# Altium PCB TPS54627DDAR_PCB.PcbDoc
Units mil, origin at the board's own origin, x right, y up, seen from the top; angles counter-clockwise.
Board outline not stored, 2 copper layers (Top Layer, Bottom Layer); 13 components, 0 nets, 33 pads, 6 vias.
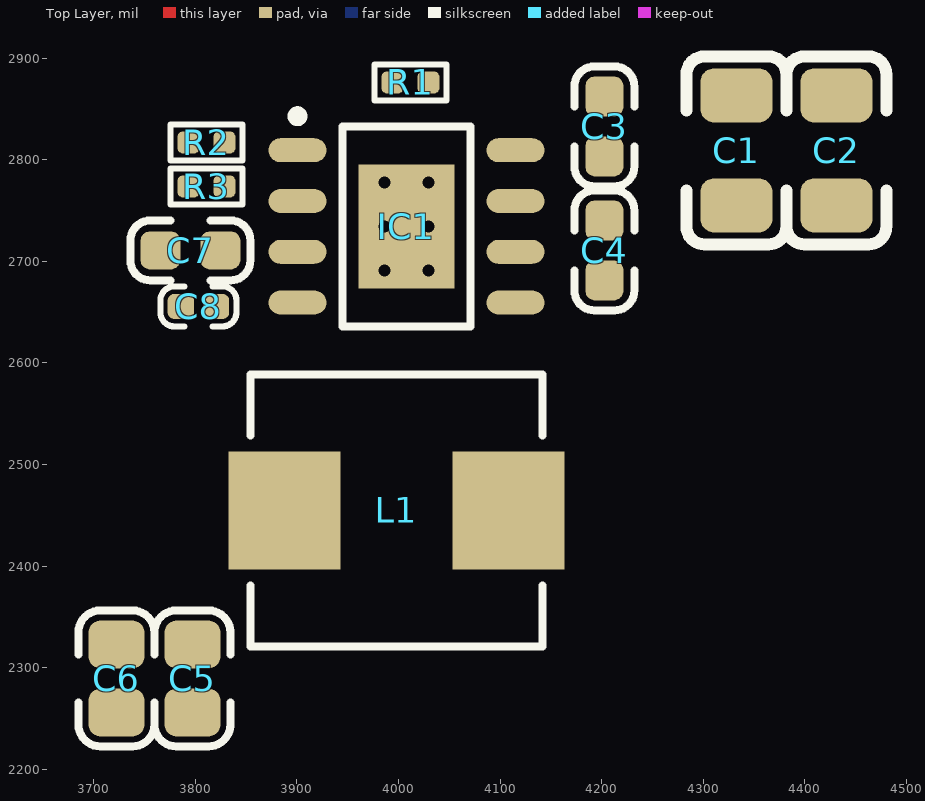
[diagram p0: Top Layer view]
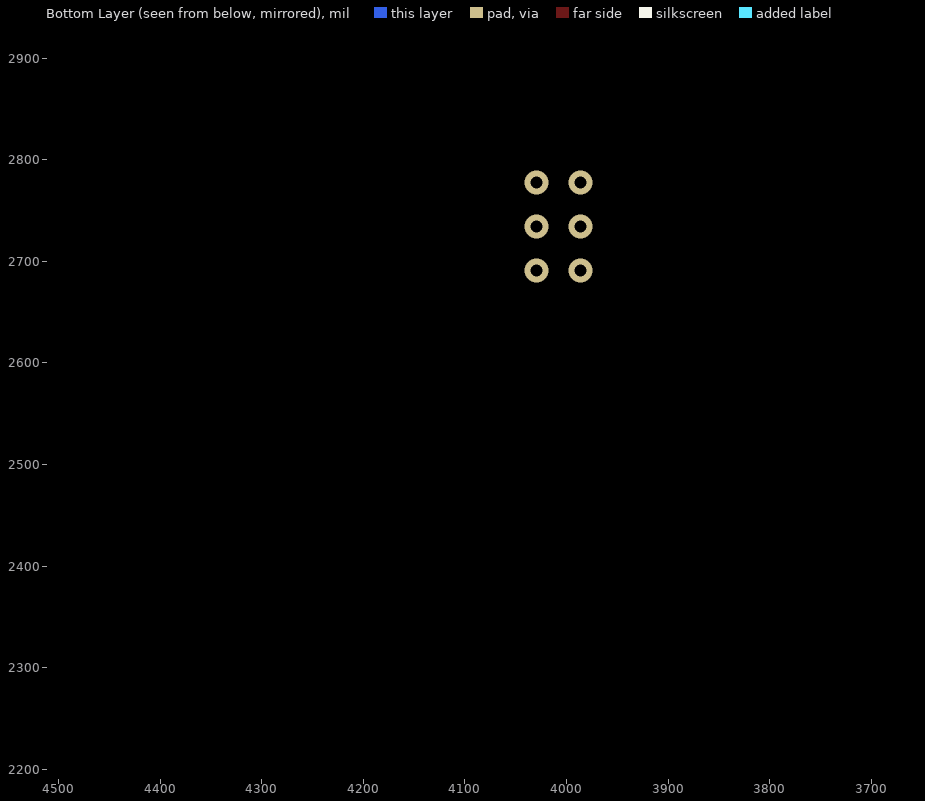
[diagram p1: Bottom Layer view, seen from below]

## Layer stack, top to bottom
Top Solder: solder mask 0.4, Solder Resist, Dk 3.5
Top Layer: signal copper 1.4
Dielectric 1: dielectric 12.6, FR-4, Dk 4.8
Bottom Layer: signal copper 1.4
Bottom Solder: solder mask 0.4, Solder Resist, Dk 3.5

## Components (designator, comment, footprint, x,y, rotation, side; value= is the part's Value field where it differs from the comment)
C1 "10uF" C_1206 4332.68,2809.05 r270 top
C2 "10uF" C_1206 4431.1,2809.05 r270 top
C3 "100nF" C_0603 4202.76,2832.68 r270 top
C4 "100nF" C_0603 4202.76,2710.63 r90 top
C5 "22uF" C_0805 3797.24,2289.37 r90 top
C6 "22uF" C_0805 3722.44,2289.37 r90 top
C7 "1uF" C_0603 3795.28,2710.63 r180 top
C8 "8.2nF" C_0402 3803.15,2655.51 r0 top
IC1 "TPS54627DDAR" SOIC-8-PowerPAD 4007.87,2734.25 r0 top
L1 "MHCI06030-3R3M-R8A" Ind-SMD_7.3x6.6 3998.03,2454.72 r180 top
R1 "10kΩ" R_0402 4011.81,2875.98 r0 top
R2 "124kΩ" R_0402 3811.02,2816.93 r0 top
R3 "22kΩ" R_0402 3811.02,2773.62 r0 top

## Footprints (in the part's own frame and the unit in brackets; to place one, negate y for a bottom-side part, rotate by r counter-clockwise, add the part's x,y. Pads: shape width x height; smd on the part's side, far side on the other; paste and mask are expansions set on the pad)
C_0402 [mm] "Chip Capacitor, 2-Leads, Body 1.00x0.50mm, IPC Medium Density"
  rrect50% 0.66x0.62 smd: 1(-0.44,0) 2(0.44,0)
  silkscreen extent -0.95,-0.5 0.95,0.5, body extent -0.52,-0.27 0.53,0.28, height 0.55
C_0603 [mm] "Chip Capacitor, 2-Leads, Body 1.60x0.80mm, IPC Medium Density"
  rrect50% 1x0.95 smd: 1(-0.75,0) 2(0.75,0)
  silkscreen extent -1.5,-0.75 1.5,0.75, body extent -0.8,-0.4 0.8,0.4, height 0.87
C_0805 [mm] "Chip Capacitor, 2-Leads, Body 2.00x1.25mm, IPC Medium Density"
  rrect50% 1.2x1.4 smd: 1(-0.85,0) 2(0.85,0)
  silkscreen extent -1.7,-0.95 1.7,0.95, body extent -1,-0.62 1,0.63, height 0.88
C_1206 [mm] "Chip Capacitor, 2-Leads, Body 3.20x1.60mm, IPC Medium Density"
  rrect50% 1.35x1.8 smd: 1(-1.375,0) 2(1.375,0)
  silkscreen extent -2.35,-1.25 2.35,1.25, body extent -1.6,-0.8 1.6,0.8, height 1.8
Ind-SMD_7.3x6.6 [mm] "Molded Inductor, 2-Leads, Body 7.30x6.60mm, IPC Medium Density"
  rect 2.8x2.95 smd: 1(-2.8,0) 2(2.8,0)
  silkscreen extent -3.65,-3.4 3.65,3.4, body extent -3.45,-3.3 3.45,3.3, height 2.81
R_0402 [mm] "Chip Resistor, 2-Leads, Body 1.00x0.50mm, IPC Medium Density"
  rrect50% 0.55x0.55 smd: 1(-0.45,0) 2(0.45,0)
  silkscreen extent -0.9,-0.45 0.9,0.45, body extent -0.5,-0.27 0.5,0.28, height 0.4
SOIC-8-PowerPAD [mm] "SOIC, 8-Leads, Body 4.90x3.90mm, Pitch 1.27mm, Thermal Pad 3.10x2.40mm, IPC Medium Density"
  oval 1.45x0.6 smd: 1(-2.725,1.905) 2(-2.725,0.635) 3(-2.725,-0.635) 4(-2.725,-1.905) 5(2.725,-1.905) 6(2.725,-0.635) 7(2.725,0.635) 8(2.725,1.905)
  rect 2.4x3.1 smd: 9(0,0)
  silkscreen extent -2.85,-2.5 1.6,2.88, body extent -3,-2.45 3,2.45, height 1.7

## Part data
C1 C2 C3 C4 C5 C6 C7 C8: library part Cap_Chip, "贴片电容"
IC1: "DC-DC 降压芯片", LCSC=C398919,C353861, Manufacturer_Name="Texas Instruments", Manufacturer_Part_Number=TPS54627DDAR
L1: library part Ind_Molded, "一体成型功率电感"
R1 R2 R3: library part Res_Chip, "贴片电阻"

## Via types
v1: diameter 23.62, hole 11.81, Top Layer to Bottom Layer, 6 vias

## Nets (pads, with @x,y where several pads share a name; then routed paths per layer and width w, separated by ;. In a path a pad name is that pad's centre, name@x,y a point inside that pad or via, vN(x,y) a via of type N, cw(c..) or ccw(c..) an arc to the next point about the centre after c; other vN are vias at no path point)
pads on no net: C1.1 C1.2 C2.1 C2.2 C3.1 C3.2 C4.1 C4.2 C5.1 C5.2 C6.1 C6.2 C7.1 C7.2 C8.1 C8.2 IC1.1 IC1.2 IC1.3 IC1.4 IC1.5 IC1.6 IC1.7 IC1.8 IC1.9 L1.1 L1.2 R1.1 R1.2 R2.1 R2.2 R3.1 R3.2
copper on no net:
  other v1: 3986.22,2690.94 4029.53,2690.94 3986.22,2734.25 4029.53,2734.25 3986.22,2777.56 4029.53,2777.56